# EAGLE board binary_clock_panelized (EAGLE 7.7.0), part 1 of 2
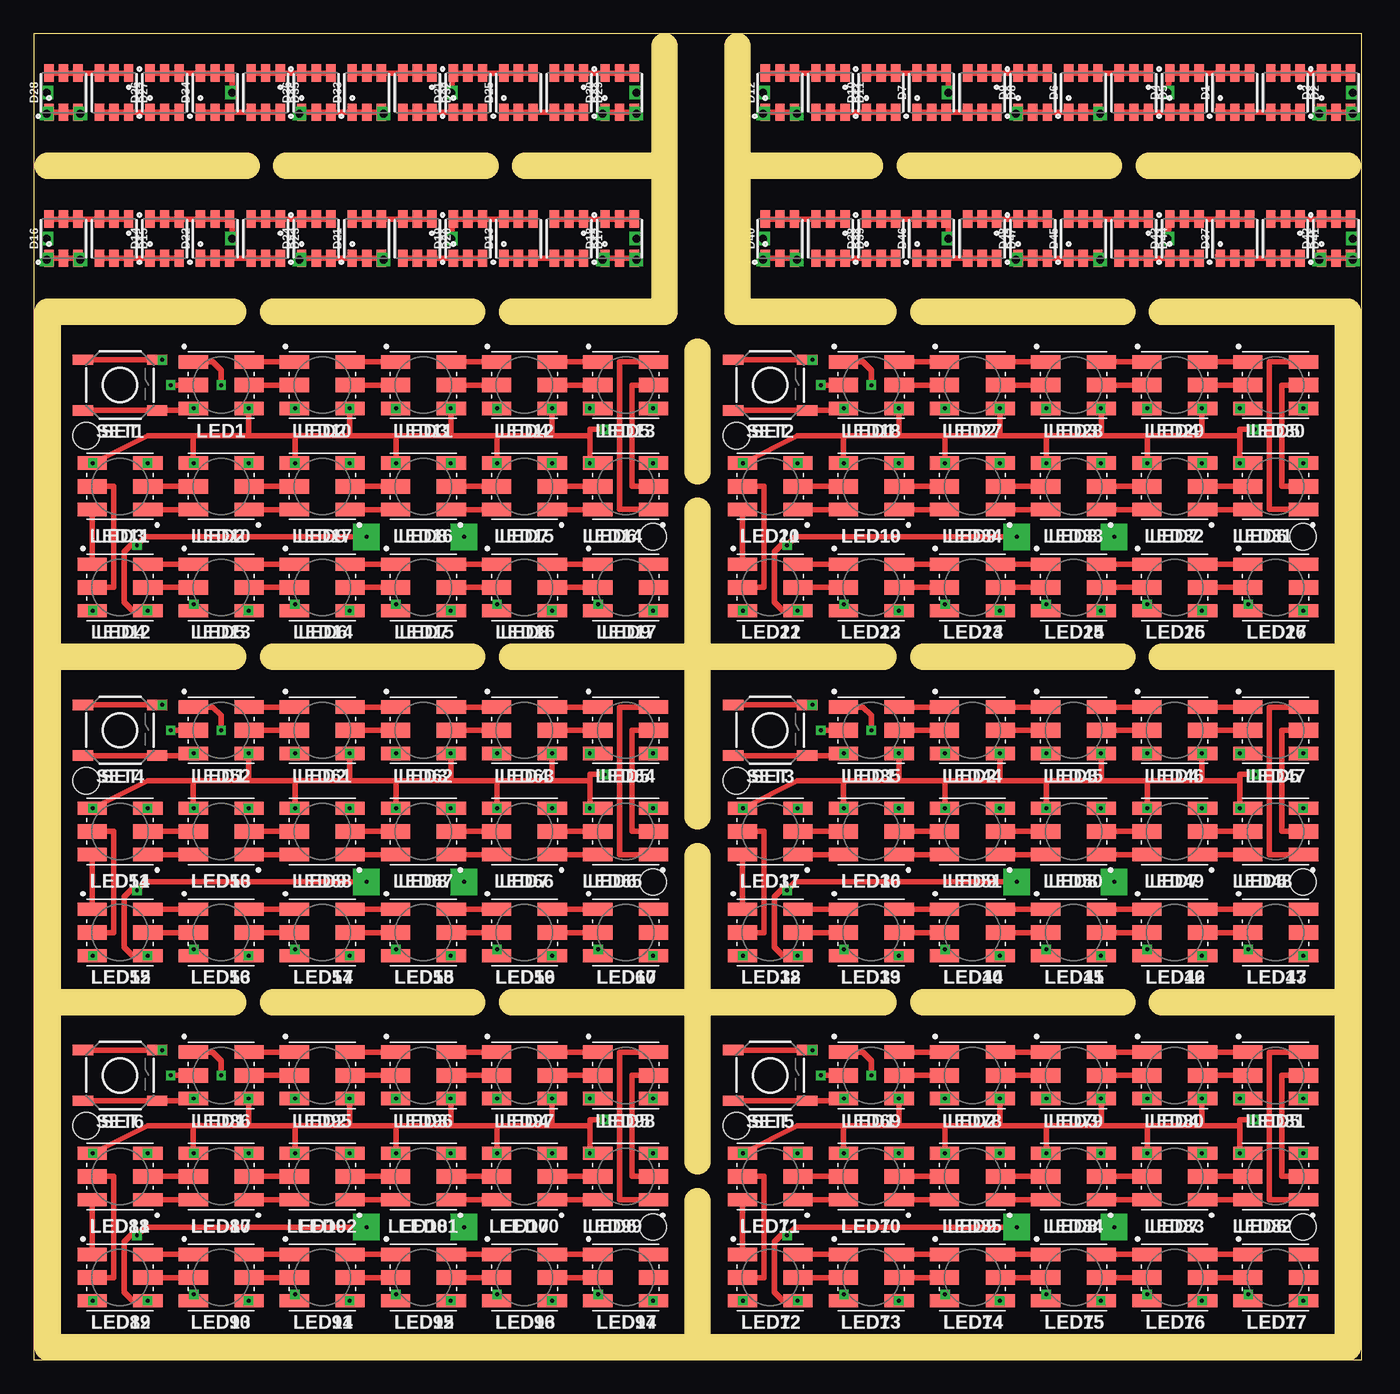
[diagram p0: board, top side]
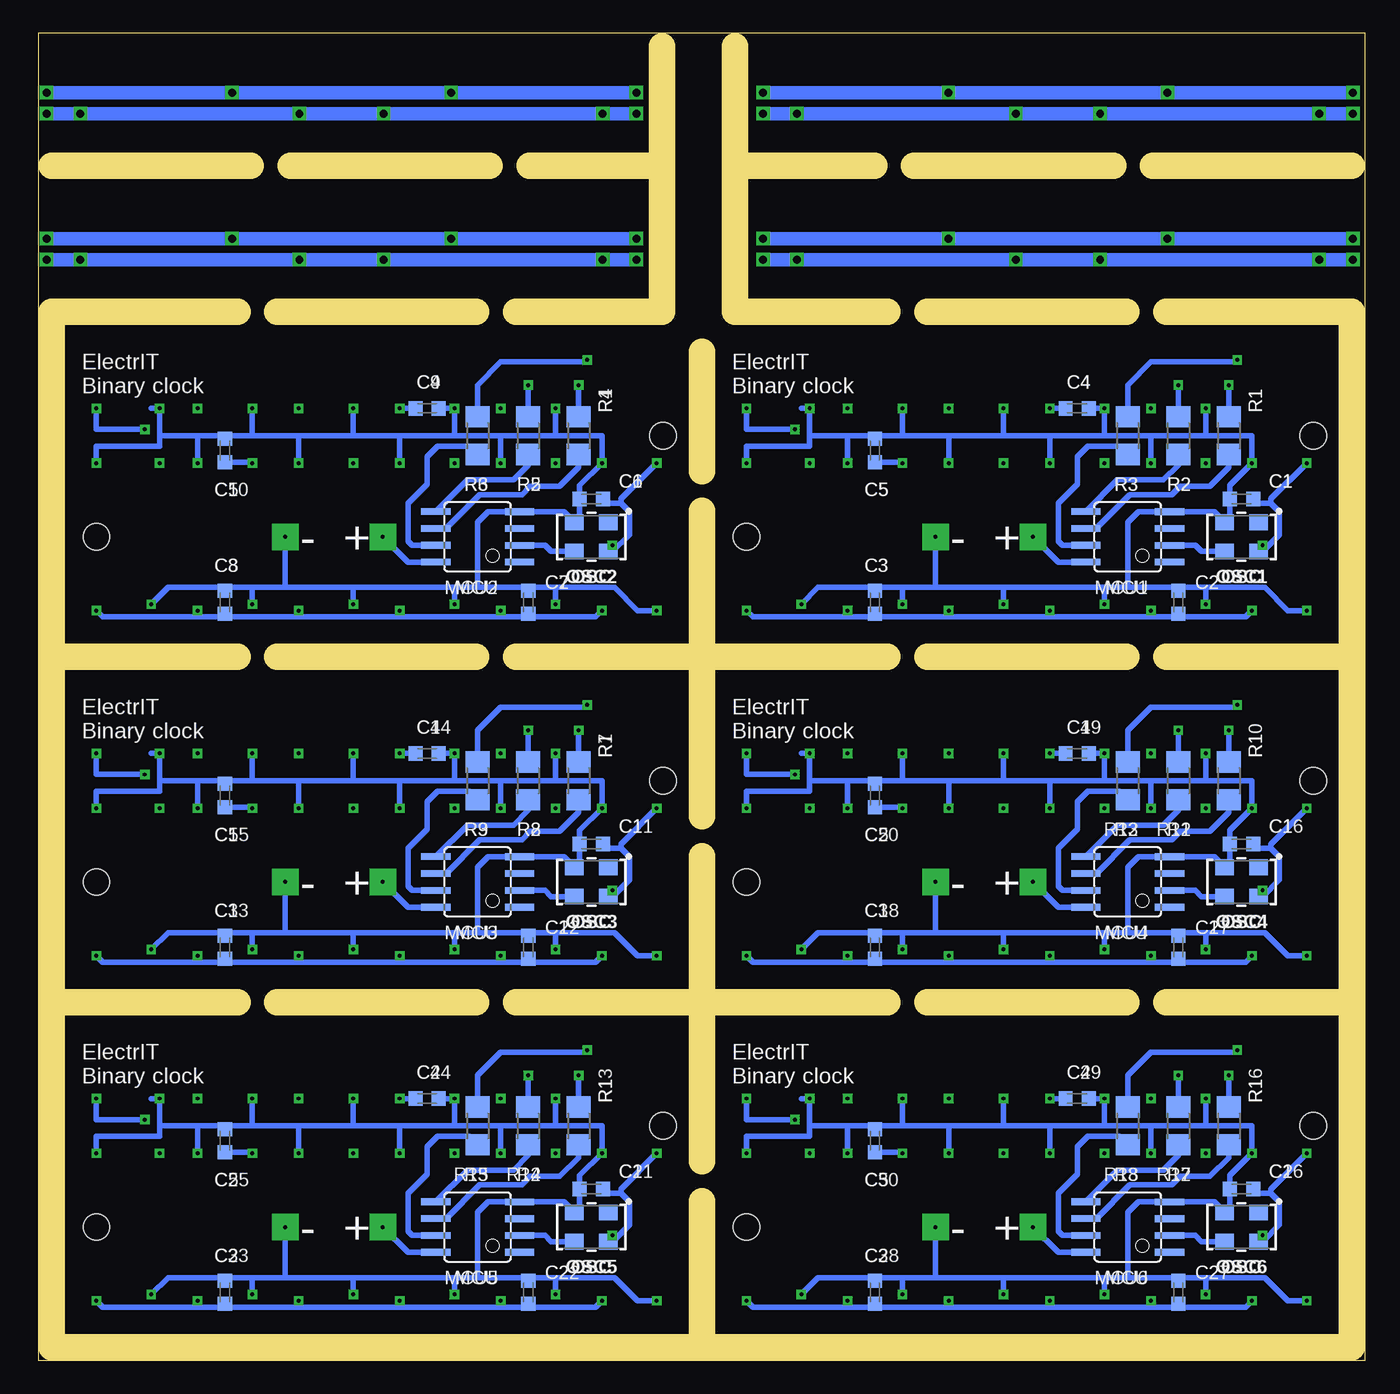
[diagram p1: board, bottom side, seen from below]

Size 100 x 100 mm. Coordinates in mm from the lower left corner, seen from the top.
Outline: 0,0 0,100 100,100 100,0 0,0
Copper layers (1*16): Top 0.035mm / dielectric 1.5mm / Bottom 0.035mm
Design rules "default": minimum track width 10mil, minimum drill 24mil, track to track 8mil, track to pad 8mil, pad to pad 8mil, via to via 8mil, smd to smd 8mil, copper to edge 40mil, drill to drill 8mil, minimum pad ring 10mil, minimum via ring 8mil, stop-mask expansion 4mil, vias tented up to drill 0mil, thermal gap 10mil
Holes 2 mm at 46.63,62.05 3.93,69.67 95.63,62.05 52.93,69.67 95.63,36.05 52.93,43.67 46.63,36.05 3.93,43.67 95.63,10.05 52.93,17.67 46.63,10.05 3.93,17.67
Milling: 44 lines

## Footprints (pad centres in the part's own frame; a part is rotated, then mirrored left to right if it is on the bottom)
C0603K = smd 1.05 x 1.08: 1 -0.875,0; 2 0.875,0
PLCC-6-LED = smd 1.3 x 0.7: AB 1.475,1.1; AG 1.475,-1.1; AR 1.475,0; CB -1.475,1.1; CG -1.475,-1.1; CR -1.475,0
APA102-5050 = smd 1 x 2.2: P1 -1.75,-2.1; P3 1.75,-2.1; P4 1.75,2.1; P6 -1.75,2.1 | smd 1.1 x 2.2: P2 0,-2.1; P5 0,2.1
SOIC8 = smd 0.5 x 2.2: 1 -1.905,-3.154; 2 -0.645,-3.154; 3 0.625,-3.154; 4 1.895,-3.154; 5 1.905,3.154; 6 0.635,3.154; 7 -0.635,3.154; 8 -1.905,3.154
OSCILLATOR-SMD-5X3.2 = smd 1.397 x 1.194: 1 -1.27,-1.1; 2 1.27,-1.1; 3 1.27,1.1; 4 -1.27,1.1
R1206 = smd 1.6 x 1.803: 1 -1.422,0; 2 1.422,0
TACTILE_SWITCH_SMD_5.2MM = smd 1.524 x 0.762: 1 -2.794,1.905; 2 2.794,1.905; 3 -2.794,-1.905; 4 2.794,-1.905

## Placement (x,y rotation side)
C1  [C0603K]  9.33,64.91 180 bottom
C2  [C0603K]  14.09,57.13 90 bottom
C3  [C0603K]  36.95,57.13 90 bottom
C4  [C0603K]  21.71,71.73 0 bottom
C5  [C0603K]  36.95,68.56 90 bottom
C6  [C0603K]  58.33,64.91 180 bottom
C7  [C0603K]  63.09,57.13 90 bottom
C8  [C0603K]  85.95,57.13 90 bottom
C9  [C0603K]  70.71,71.73 0 bottom
C10  [C0603K]  85.95,68.56 90 bottom
C11  [C0603K]  58.33,38.91 180 bottom
C12  [C0603K]  63.09,31.13 90 bottom
C13  [C0603K]  85.95,31.13 90 bottom
C14  [C0603K]  70.71,45.73 0 bottom
C15  [C0603K]  85.95,42.56 90 bottom
C16  [C0603K]  9.33,38.91 180 bottom
C17  [C0603K]  14.09,31.13 90 bottom
C18  [C0603K]  36.95,31.13 90 bottom
C19  [C0603K]  21.71,45.73 0 bottom
C20  [C0603K]  36.95,42.56 90 bottom
C21  [C0603K]  58.33,12.91 180 bottom
C22  [C0603K]  63.09,5.13 90 bottom
C23  [C0603K]  85.95,5.13 90 bottom
C24  [C0603K]  70.71,19.73 0 bottom
C25  [C0603K]  85.95,16.56 90 bottom
C26  [C0603K]  9.33,12.91 180 bottom
C27  [C0603K]  14.09,5.13 90 bottom
C28  [C0603K]  36.95,5.13 90 bottom
C29  [C0603K]  21.71,19.73 0 bottom
C30  [C0603K]  36.95,16.56 90 bottom
D1  RGB  [PLCC-6-LED]  90.49,95.52 90 top
D2  RGB  [PLCC-6-LED]  94.3,95.52 270 top
D3  RGB  [PLCC-6-LED]  98.11,95.52 90 top
D4  RGB  [PLCC-6-LED]  86.68,95.52 90 top
D5  RGB  [PLCC-6-LED]  82.87,95.52 270 top
D6  RGB  [PLCC-6-LED]  79.06,95.52 90 top
D7  RGB  [PLCC-6-LED]  67.63,95.52 90 top
D8  RGB  [PLCC-6-LED]  71.44,95.52 270 top
D9  RGB  [PLCC-6-LED]  75.25,95.52 90 top
D10  RGB  [PLCC-6-LED]  63.82,95.52 90 top
D11  RGB  [PLCC-6-LED]  60.01,95.52 270 top
D12  RGB  [PLCC-6-LED]  56.2,95.52 90 top
D13  RGB  [PLCC-6-LED]  36.49,84.52 90 top
D14  RGB  [PLCC-6-LED]  9.82,84.52 90 top
D15  RGB  [PLCC-6-LED]  6.01,84.52 270 top
D16  RGB  [PLCC-6-LED]  2.2,84.52 90 top
D17  RGB  [PLCC-6-LED]  40.3,84.52 270 top
D18  RGB  [PLCC-6-LED]  44.11,84.52 90 top
D19  RGB  [PLCC-6-LED]  32.68,84.52 90 top
D20  RGB  [PLCC-6-LED]  28.87,84.52 270 top
D21  RGB  [PLCC-6-LED]  25.06,84.52 90 top
D22  RGB  [PLCC-6-LED]  13.63,84.52 90 top
D23  RGB  [PLCC-6-LED]  17.44,84.52 270 top
D24  RGB  [PLCC-6-LED]  21.25,84.52 90 top
D25  RGB  [PLCC-6-LED]  36.49,95.52 90 top
D26  RGB  [PLCC-6-LED]  9.82,95.52 90 top
D27  RGB  [PLCC-6-LED]  6.01,95.52 270 top
D28  RGB  [PLCC-6-LED]  2.2,95.52 90 top
D29  RGB  [PLCC-6-LED]  40.3,95.52 270 top
D30  RGB  [PLCC-6-LED]  44.11,95.52 90 top
D31  RGB  [PLCC-6-LED]  32.68,95.52 90 top
D32  RGB  [PLCC-6-LED]  28.87,95.52 270 top
D33  RGB  [PLCC-6-LED]  25.06,95.52 90 top
D34  RGB  [PLCC-6-LED]  13.63,95.52 90 top
D35  RGB  [PLCC-6-LED]  17.44,95.52 270 top
D36  RGB  [PLCC-6-LED]  21.25,95.52 90 top
D37  RGB  [PLCC-6-LED]  90.49,84.52 90 top
D38  RGB  [PLCC-6-LED]  63.82,84.52 90 top
D39  RGB  [PLCC-6-LED]  60.01,84.52 270 top
D40  RGB  [PLCC-6-LED]  56.2,84.52 90 top
D41  RGB  [PLCC-6-LED]  94.3,84.52 270 top
D42  RGB  [PLCC-6-LED]  98.11,84.52 90 top
D43  RGB  [PLCC-6-LED]  86.68,84.52 90 top
D44  RGB  [PLCC-6-LED]  82.87,84.52 270 top
D45  RGB  [PLCC-6-LED]  79.06,84.52 90 top
D46  RGB  [PLCC-6-LED]  67.63,84.52 90 top
D47  RGB  [PLCC-6-LED]  71.44,84.52 270 top
D48  RGB  [PLCC-6-LED]  75.25,84.52 90 top
LED1  APA102-5050  [APA102-5050]  14.09,73.48 270 top
LED2  APA102-5050  [APA102-5050]  14.09,65.86 90 top
LED3  APA102-5050  [APA102-5050]  6.47,65.86 90 top
LED4  APA102-5050  [APA102-5050]  6.47,58.24 270 top
LED5  APA102-5050  [APA102-5050]  14.09,58.24 270 top
LED6  APA102-5050  [APA102-5050]  21.71,58.24 270 top
LED7  APA102-5050  [APA102-5050]  29.33,58.24 270 top
LED8  APA102-5050  [APA102-5050]  36.95,58.24 270 top
LED9  APA102-5050  [APA102-5050]  44.57,58.24 270 top
LED10  APA102-5050  [APA102-5050]  21.71,73.48 270 top
LED11  APA102-5050  [APA102-5050]  29.33,73.48 270 top
LED12  APA102-5050  [APA102-5050]  36.95,73.48 270 top
LED13  APA102-5050  [APA102-5050]  44.57,73.48 270 top
LED14  APA102-5050  [APA102-5050]  44.57,65.86 90 top
LED15  APA102-5050  [APA102-5050]  36.95,65.86 90 top
LED16  APA102-5050  [APA102-5050]  29.33,65.86 90 top
LED17  APA102-5050  [APA102-5050]  21.71,65.86 90 top
LED18  APA102-5050  [APA102-5050]  63.09,73.48 270 top
LED19  APA102-5050  [APA102-5050]  63.09,65.86 90 top
LED20  APA102-5050  [APA102-5050]  55.47,65.86 90 top
LED21  APA102-5050  [APA102-5050]  55.47,58.24 270 top
LED22  APA102-5050  [APA102-5050]  63.09,58.24 270 top
LED23  APA102-5050  [APA102-5050]  70.71,58.24 270 top
LED24  APA102-5050  [APA102-5050]  78.33,58.24 270 top
LED25  APA102-5050  [APA102-5050]  85.95,58.24 270 top
LED26  APA102-5050  [APA102-5050]  93.57,58.24 270 top
LED27  APA102-5050  [APA102-5050]  70.71,73.48 270 top
LED28  APA102-5050  [APA102-5050]  78.33,73.48 270 top
LED29  APA102-5050  [APA102-5050]  85.95,73.48 270 top
LED30  APA102-5050  [APA102-5050]  93.57,73.48 270 top
LED31  APA102-5050  [APA102-5050]  93.57,65.86 90 top
LED32  APA102-5050  [APA102-5050]  85.95,65.86 90 top
LED33  APA102-5050  [APA102-5050]  78.33,65.86 90 top
LED34  APA102-5050  [APA102-5050]  70.71,65.86 90 top
LED35  APA102-5050  [APA102-5050]  63.09,47.48 270 top
LED36  APA102-5050  [APA102-5050]  63.09,39.86 90 top
LED37  APA102-5050  [APA102-5050]  55.47,39.86 90 top
LED38  APA102-5050  [APA102-5050]  55.47,32.24 270 top
LED39  APA102-5050  [APA102-5050]  63.09,32.24 270 top
LED40  APA102-5050  [APA102-5050]  70.71,32.24 270 top
LED41  APA102-5050  [APA102-5050]  78.33,32.24 270 top
LED42  APA102-5050  [APA102-5050]  85.95,32.24 270 top
LED43  APA102-5050  [APA102-5050]  93.57,32.24 270 top
LED44  APA102-5050  [APA102-5050]  70.71,47.48 270 top
LED45  APA102-5050  [APA102-5050]  78.33,47.48 270 top
LED46  APA102-5050  [APA102-5050]  85.95,47.48 270 top
LED47  APA102-5050  [APA102-5050]  93.57,47.48 270 top
LED48  APA102-5050  [APA102-5050]  93.57,39.86 90 top
LED49  APA102-5050  [APA102-5050]  85.95,39.86 90 top
LED50  APA102-5050  [APA102-5050]  78.33,39.86 90 top
LED51  APA102-5050  [APA102-5050]  70.71,39.86 90 top
LED52  APA102-5050  [APA102-5050]  14.09,47.48 270 top
LED53  APA102-5050  [APA102-5050]  14.09,39.86 90 top
LED54  APA102-5050  [APA102-5050]  6.47,39.86 90 top
LED55  APA102-5050  [APA102-5050]  6.47,32.24 270 top
LED56  APA102-5050  [APA102-5050]  14.09,32.24 270 top
LED57  APA102-5050  [APA102-5050]  21.71,32.24 270 top
LED58  APA102-5050  [APA102-5050]  29.33,32.24 270 top
LED59  APA102-5050  [APA102-5050]  36.95,32.24 270 top
LED60  APA102-5050  [APA102-5050]  44.57,32.24 270 top
LED61  APA102-5050  [APA102-5050]  21.71,47.48 270 top
LED62  APA102-5050  [APA102-5050]  29.33,47.48 270 top
LED63  APA102-5050  [APA102-5050]  36.95,47.48 270 top
LED64  APA102-5050  [APA102-5050]  44.57,47.48 270 top
LED65  APA102-5050  [APA102-5050]  44.57,39.86 90 top
LED66  APA102-5050  [APA102-5050]  36.95,39.86 90 top
LED67  APA102-5050  [APA102-5050]  29.33,39.86 90 top
LED68  APA102-5050  [APA102-5050]  21.71,39.86 90 top
LED69  APA102-5050  [APA102-5050]  63.09,21.48 270 top
LED70  APA102-5050  [APA102-5050]  63.09,13.86 90 top
LED71  APA102-5050  [APA102-5050]  55.47,13.86 90 top
LED72  APA102-5050  [APA102-5050]  55.47,6.24 270 top
LED73  APA102-5050  [APA102-5050]  63.09,6.24 270 top
LED74  APA102-5050  [APA102-5050]  70.71,6.24 270 top
LED75  APA102-5050  [APA102-5050]  78.33,6.24 270 top
LED76  APA102-5050  [APA102-5050]  85.95,6.24 270 top
LED77  APA102-5050  [APA102-5050]  93.57,6.24 270 top
LED78  APA102-5050  [APA102-5050]  70.71,21.48 270 top
LED79  APA102-5050  [APA102-5050]  78.33,21.48 270 top
LED80  APA102-5050  [APA102-5050]  85.95,21.48 270 top
LED81  APA102-5050  [APA102-5050]  93.57,21.48 270 top
LED82  APA102-5050  [APA102-5050]  93.57,13.86 90 top
LED83  APA102-5050  [APA102-5050]  85.95,13.86 90 top
LED84  APA102-5050  [APA102-5050]  78.33,13.86 90 top
LED85  APA102-5050  [APA102-5050]  70.71,13.86 90 top
LED86  APA102-5050  [APA102-5050]  14.09,21.48 270 top
LED87  APA102-5050  [APA102-5050]  14.09,13.86 90 top
LED88  APA102-5050  [APA102-5050]  6.47,13.86 90 top
LED89  APA102-5050  [APA102-5050]  6.47,6.24 270 top
LED90  APA102-5050  [APA102-5050]  14.09,6.24 270 top
LED91  APA102-5050  [APA102-5050]  21.71,6.24 270 top
LED92  APA102-5050  [APA102-5050]  29.33,6.24 270 top
LED93  APA102-5050  [APA102-5050]  36.95,6.24 270 top
LED94  APA102-5050  [APA102-5050]  44.57,6.24 270 top
LED95  APA102-5050  [APA102-5050]  21.71,21.48 270 top
LED96  APA102-5050  [APA102-5050]  29.33,21.48 270 top
LED97  APA102-5050  [APA102-5050]  36.95,21.48 270 top
LED98  APA102-5050  [APA102-5050]  44.57,21.48 270 top
LED99  APA102-5050  [APA102-5050]  44.57,13.86 90 top
LED100  APA102-5050  [APA102-5050]  36.95,13.86 90 top
LED101  APA102-5050  [APA102-5050]  29.33,13.86 90 top
LED102  APA102-5050  [APA102-5050]  21.71,13.86 90 top
MCU1  TINY25-20SU  [SOIC8]  17.9,62.05 90 bottom
MCU2  TINY25-20SU  [SOIC8]  66.9,62.05 90 bottom
MCU3  TINY25-20SU  [SOIC8]  66.9,36.05 90 bottom
MCU4  TINY25-20SU  [SOIC8]  17.9,36.05 90 bottom
MCU5  TINY25-20SU  [SOIC8]  66.9,10.05 90 bottom
MCU6  TINY25-20SU  [SOIC8]  17.9,10.05 90 bottom
OSC1  OSCILLATORSMD-5X3  [OSCILLATOR-SMD-5X3.2]  9.33,62.05 180 bottom
OSC2  OSCILLATORSMD-5X3  [OSCILLATOR-SMD-5X3.2]  58.33,62.05 180 bottom
OSC3  OSCILLATORSMD-5X3  [OSCILLATOR-SMD-5X3.2]  58.33,36.05 180 bottom
OSC4  OSCILLATORSMD-5X3  [OSCILLATOR-SMD-5X3.2]  9.33,36.05 180 bottom
OSC5  OSCILLATORSMD-5X3  [OSCILLATOR-SMD-5X3.2]  58.33,10.05 180 bottom
OSC6  OSCILLATORSMD-5X3  [OSCILLATOR-SMD-5X3.2]  9.33,10.05 180 bottom
R1  [R1206]  10.28,69.67 90 bottom
R2  [R1206]  14.09,69.67 90 bottom
R3  [R1206]  17.9,69.67 90 bottom
R4  [R1206]  59.28,69.67 90 bottom
R5  [R1206]  63.09,69.67 90 bottom
R6  [R1206]  66.9,69.67 90 bottom
R7  [R1206]  59.28,43.67 90 bottom
R8  [R1206]  63.09,43.67 90 bottom
R9  [R1206]  66.9,43.67 90 bottom
R10  [R1206]  10.28,43.67 90 bottom
R11  [R1206]  14.09,43.67 90 bottom
R12  [R1206]  17.9,43.67 90 bottom
R13  [R1206]  59.28,17.67 90 bottom
R14  [R1206]  63.09,17.67 90 bottom
R15  [R1206]  66.9,17.67 90 bottom
R16  [R1206]  10.28,17.67 90 bottom
R17  [R1206]  14.09,17.67 90 bottom
R18  [R1206]  17.9,17.67 90 bottom
SET1  SET  [TACTILE_SWITCH_SMD_5.2MM]  6.47,73.48 0 top
SET2  SET  [TACTILE_SWITCH_SMD_5.2MM]  55.47,73.48 0 top
SET3  SET  [TACTILE_SWITCH_SMD_5.2MM]  55.47,47.48 0 top
SET4  SET  [TACTILE_SWITCH_SMD_5.2MM]  6.47,47.48 0 top
SET5  SET  [TACTILE_SWITCH_SMD_5.2MM]  55.47,21.48 0 top
SET6  SET  [TACTILE_SWITCH_SMD_5.2MM]  6.47,21.48 0 top

## Library data of the parts
C1-C30 R1-R18 = rcl
D1-D48 = SparkFun-LED; PROD_ID: DIO-12113
LED1-LED102 = SparkFun-LED; PROD_ID: DIO-13739
MCU1-MCU6 = avr-4
OSC1-OSC6 = SparkFun-Clocks
SET1-SET6 = SparkFun-Switches; PROD_ID: SWCH-08247; SF_SKU: COM-08720

## Nets
+5V1: C1.1 C2.1 C3.1 C4.1 C5.1 LED1.P4 LED2.P4 LED3.P4 LED4.P4 LED5.P4 LED6.P4 LED7.P4 LED8.P4 LED10.P4 LED11.P4 LED12.P4 LED13.P4 LED14.P4 LED15.P4 LED16.P4 LED17.P4 MCU1.8 OSC1.4
+5V2: C6.1 C7.1 C8.1 C9.1 C10.1 LED18.P4 LED19.P4 LED20.P4 LED21.P4 LED22.P4 LED23.P4 LED24.P4 LED25.P4 LED27.P4 LED28.P4 LED29.P4 LED30.P4 LED31.P4 LED32.P4 LED33.P4 LED34.P4 MCU2.8 OSC2.4
+5V3: C11.1 C12.1 C13.1 C14.1 C15.1 LED35.P4 LED36.P4 LED37.P4 LED38.P4 LED39.P4 LED40.P4 LED41.P4 LED42.P4 LED44.P4 LED45.P4 LED46.P4 LED47.P4 LED48.P4 LED49.P4 LED50.P4 LED51.P4 MCU3.8 OSC3.4
+5V4: C16.1 C17.1 C18.1 C19.1 C20.1 LED52.P4 LED53.P4 LED54.P4 LED55.P4 LED56.P4 LED57.P4 LED58.P4 LED59.P4 LED61.P4 LED62.P4 LED63.P4 LED64.P4 LED65.P4 LED66.P4 LED67.P4 LED68.P4 MCU4.8 OSC4.4
+5V5: C21.1 C22.1 C23.1 C24.1 C25.1 LED69.P4 LED70.P4 LED71.P4 LED72.P4 LED73.P4 LED74.P4 LED75.P4 LED76.P4 LED78.P4 LED79.P4 LED80.P4 LED81.P4 LED82.P4 LED83.P4 LED84.P4 LED85.P4 MCU5.8 OSC5.4
+5V6: C26.1 C27.1 C28.1 C29.1 C30.1 LED86.P4 LED87.P4 LED88.P4 LED89.P4 LED90.P4 LED91.P4 LED92.P4 LED93.P4 LED95.P4 LED96.P4 LED97.P4 LED98.P4 LED99.P4 LED100.P4 LED101.P4 LED102.P4 MCU6.8 OSC6.4
GND1: C1.2 C2.2 C3.2 C4.2 C5.2 LED1.P3 LED2.P3 LED3.P3 LED4.P3 LED5.P3 LED6.P3 LED7.P3 LED8.P3 LED9.P3 LED10.P3 LED11.P3 LED12.P3 LED13.P3 LED14.P3 LED15.P3 LED16.P3 LED17.P3 MCU1.4 OSC1.2 SET1.3 SET1.4
GND2: C6.2 C7.2 C8.2 C9.2 C10.2 LED18.P3 LED19.P3 LED20.P3 LED21.P3 LED22.P3 LED23.P3 LED24.P3 LED25.P3 LED26.P3 LED27.P3 LED28.P3 LED29.P3 LED30.P3 LED31.P3 LED32.P3 LED33.P3 LED34.P3 MCU2.4 OSC2.2 SET2.3 SET2.4
GND3: C11.2 C12.2 C13.2 C14.2 C15.2 LED35.P3 LED36.P3 LED37.P3 LED38.P3 LED39.P3 LED40.P3 LED41.P3 LED42.P3 LED43.P3 LED44.P3 LED45.P3 LED46.P3 LED47.P3 LED48.P3 LED49.P3 LED50.P3 LED51.P3 MCU3.4 OSC3.2 SET3.3 SET3.4
GND4: C16.2 C17.2 C18.2 C19.2 C20.2 LED52.P3 LED53.P3 LED54.P3 LED55.P3 LED56.P3 LED57.P3 LED58.P3 LED59.P3 LED60.P3 LED61.P3 LED62.P3 LED63.P3 LED64.P3 LED65.P3 LED66.P3 LED67.P3 LED68.P3 MCU4.4 OSC4.2 SET4.3 SET4.4
GND5: C21.2 C22.2 C23.2 C24.2 C25.2 LED69.P3 LED70.P3 LED71.P3 LED72.P3 LED73.P3 LED74.P3 LED75.P3 LED76.P3 LED77.P3 LED78.P3 LED79.P3 LED80.P3 LED81.P3 LED82.P3 LED83.P3 LED84.P3 LED85.P3 MCU5.4 OSC5.2 SET5.3 SET5.4
GND6: C26.2 C27.2 C28.2 C29.2 C30.2 LED86.P3 LED87.P3 LED88.P3 LED89.P3 LED90.P3 LED91.P3 LED92.P3 LED93.P3 LED94.P3 LED95.P3 LED96.P3 LED97.P3 LED98.P3 LED99.P3 LED100.P3 LED101.P3 LED102.P3 MCU6.4 OSC6.2 SET6.3 SET6.4
GND7: D3.CB D3.CG D3.CR D6.CB D6.CG D6.CR D9.CB D9.CG D9.CR D12.CB D12.CG D12.CR
GND8: D16.CB D16.CG D16.CR D18.CB D18.CG D18.CR D21.CB D21.CG D21.CR D24.CB D24.CG D24.CR
GND9: D28.CB D28.CG D28.CR D30.CB D30.CG D30.CR D33.CB D33.CG D33.CR D36.CB D36.CG D36.CR
GND10: D40.CB D40.CG D40.CR D42.CB D42.CG D42.CR D45.CB D45.CG D45.CR D48.CB D48.CG D48.CR
LED_CK1: MCU1.6 R1.1
LED_CK2: MCU2.6 R4.1
LED_CK3: MCU3.6 R7.1
LED_CK4: MCU4.6 R10.1
LED_CK5: MCU5.6 R13.1
LED_CK6: MCU6.6 R16.1
LED_D1: MCU1.5 R2.1
LED_D2: MCU2.5 R5.1
LED_D3: MCU3.5 R8.1
LED_D4: MCU4.5 R11.1
LED_D5: MCU5.5 R14.1
LED_D6: MCU6.5 R17.1
N$1: LED1.P5 LED10.P2
N$2: LED1.P6 LED10.P1
N$3: LED10.P5 LED11.P2
N$4: LED10.P6 LED11.P1
N$5: LED11.P5 LED12.P2
N$6: LED11.P6 LED12.P1
N$7: LED12.P5 LED13.P2
N$8: LED12.P6 LED13.P1
N$9: LED4.P5 LED5.P2
N$10: LED4.P6 LED5.P1
N$11: LED5.P5 LED6.P2
N$12: LED5.P6 LED6.P1
N$13: LED6.P5 LED7.P2
N$14: LED6.P6 LED7.P1
N$15: LED7.P5 LED8.P2
N$16: LED7.P6 LED8.P1
N$17: LED8.P5 LED9.P2
N$18: LED8.P6 LED9.P1
N$19: LED9.P4
N$20: LED2.P5 LED3.P2
N$21: LED2.P6 LED3.P1
N$22: LED2.P1 LED17.P6
N$23: LED2.P2 LED17.P5
N$24: LED16.P6 LED17.P1
N$25: LED16.P5 LED17.P2
N$26: LED15.P6 LED16.P1
N$27: LED15.P5 LED16.P2
N$28: LED14.P6 LED15.P1
N$29: LED14.P5 LED15.P2
N$30: LED3.P6 LED4.P1
N$31: LED3.P5 LED4.P2
N$32: LED9.P6
N$33: LED9.P5
N$34: LED13.P6 LED14.P1
N$35: LED1.P1 R2.2
N$36: LED1.P2 R1.2
N$37: LED13.P5 LED14.P2
N$38: MCU1.1
N$39: MCU1.3
N$40: MCU1.2 OSC1.3
N$41: R3.2 SET1.1 SET1.2
N$42: LED18.P5 LED27.P2
N$43: LED18.P6 LED27.P1
N$44: LED27.P5 LED28.P2
N$45: LED27.P6 LED28.P1
N$46: LED28.P5 LED29.P2
N$47: LED28.P6 LED29.P1
N$48: LED29.P5 LED30.P2
N$49: LED29.P6 LED30.P1
N$50: LED21.P5 LED22.P2
N$51: LED21.P6 LED22.P1
N$52: LED22.P5 LED23.P2
N$53: LED22.P6 LED23.P1
N$54: LED23.P5 LED24.P2
N$55: LED23.P6 LED24.P1
N$56: LED24.P5 LED25.P2
N$57: LED24.P6 LED25.P1
N$58: LED25.P5 LED26.P2
N$59: LED25.P6 LED26.P1
N$60: LED26.P4
N$61: LED19.P5 LED20.P2
N$62: LED19.P6 LED20.P1
N$63: LED19.P1 LED34.P6
N$64: LED19.P2 LED34.P5
N$65: LED33.P6 LED34.P1
N$66: LED33.P5 LED34.P2
N$67: LED32.P6 LED33.P1
N$68: LED32.P5 LED33.P2
N$69: LED31.P6 LED32.P1
N$70: LED31.P5 LED32.P2
N$71: LED20.P6 LED21.P1
N$72: LED20.P5 LED21.P2
N$73: LED26.P6
N$74: LED26.P5
N$75: LED30.P6 LED31.P1
N$76: LED18.P1 R5.2
N$77: LED18.P2 R4.2
N$78: LED30.P5 LED31.P2
N$79: MCU2.1
N$80: MCU2.3
N$81: MCU2.2 OSC2.3
N$82: R6.2 SET2.1 SET2.2
N$83: LED35.P5 LED44.P2
N$84: LED35.P6 LED44.P1
N$85: LED44.P5 LED45.P2
N$86: LED44.P6 LED45.P1
N$87: LED45.P5 LED46.P2
N$88: LED45.P6 LED46.P1
N$89: LED46.P5 LED47.P2
N$90: LED46.P6 LED47.P1
N$91: LED38.P5 LED39.P2
N$92: LED38.P6 LED39.P1
N$93: LED39.P5 LED40.P2
N$94: LED39.P6 LED40.P1
N$95: LED40.P5 LED41.P2
N$96: LED40.P6 LED41.P1
N$97: LED41.P5 LED42.P2
N$98: LED41.P6 LED42.P1
N$99: LED42.P5 LED43.P2
N$100: LED42.P6 LED43.P1
N$101: LED43.P4
N$102: LED36.P5 LED37.P2
N$103: LED36.P6 LED37.P1
N$104: LED36.P1 LED51.P6
N$105: LED36.P2 LED51.P5
N$106: LED50.P6 LED51.P1
N$107: LED50.P5 LED51.P2
N$108: LED49.P6 LED50.P1
N$109: LED49.P5 LED50.P2
N$110: LED48.P6 LED49.P1
N$111: LED48.P5 LED49.P2
N$112: LED37.P6 LED38.P1
N$113: LED37.P5 LED38.P2
N$114: LED43.P6
N$115: LED43.P5
N$116: LED47.P6 LED48.P1
N$117: LED35.P1 R8.2
N$118: LED35.P2 R7.2
N$119: LED47.P5 LED48.P2
N$120: MCU3.1
N$121: MCU3.3
N$122: MCU3.2 OSC3.3
N$123: R9.2 SET3.1 SET3.2
N$124: LED52.P5 LED61.P2
N$125: LED52.P6 LED61.P1
N$126: LED61.P5 LED62.P2
N$127: LED61.P6 LED62.P1
N$128: LED62.P5 LED63.P2
N$129: LED62.P6 LED63.P1
N$130: LED63.P5 LED64.P2
N$131: LED63.P6 LED64.P1
N$132: LED55.P5 LED56.P2
N$133: LED55.P6 LED56.P1
N$134: LED56.P5 LED57.P2
N$135: LED56.P6 LED57.P1
N$136: LED57.P5 LED58.P2
N$137: LED57.P6 LED58.P1
N$138: LED58.P5 LED59.P2
N$139: LED58.P6 LED59.P1
N$140: LED59.P5 LED60.P2
N$141: LED59.P6 LED60.P1
N$142: LED60.P4
N$143: LED53.P5 LED54.P2
N$144: LED53.P6 LED54.P1
N$145: LED53.P1 LED68.P6
N$146: LED53.P2 LED68.P5
N$147: LED67.P6 LED68.P1
N$148: LED67.P5 LED68.P2
N$149: LED66.P6 LED67.P1
N$150: LED66.P5 LED67.P2
N$151: LED65.P6 LED66.P1
N$152: LED65.P5 LED66.P2
N$153: LED54.P6 LED55.P1
N$154: LED54.P5 LED55.P2
N$155: LED60.P6
N$156: LED60.P5
N$157: LED64.P6 LED65.P1
N$158: LED52.P1 R11.2
N$159: LED52.P2 R10.2
N$160: LED64.P5 LED65.P2
N$161: MCU4.1
N$162: MCU4.3
N$163: MCU4.2 OSC4.3
N$164: R12.2 SET4.1 SET4.2
N$165: LED69.P5 LED78.P2
N$166: LED69.P6 LED78.P1
N$167: LED78.P5 LED79.P2
N$168: LED78.P6 LED79.P1
N$169: LED79.P5 LED80.P2
N$170: LED79.P6 LED80.P1
N$171: LED80.P5 LED81.P2
N$172: LED80.P6 LED81.P1
N$173: LED72.P5 LED73.P2
N$174: LED72.P6 LED73.P1
N$175: LED73.P5 LED74.P2
N$176: LED73.P6 LED74.P1
N$177: LED74.P5 LED75.P2
N$178: LED74.P6 LED75.P1
N$179: LED75.P5 LED76.P2
N$180: LED75.P6 LED76.P1
N$181: LED76.P5 LED77.P2
N$182: LED76.P6 LED77.P1
N$183: LED77.P4
N$184: LED70.P5 LED71.P2
N$185: LED70.P6 LED71.P1
N$186: LED70.P1 LED85.P6
N$187: LED70.P2 LED85.P5
N$188: LED84.P6 LED85.P1
N$189: LED84.P5 LED85.P2
N$190: LED83.P6 LED84.P1
N$191: LED83.P5 LED84.P2
N$192: LED82.P6 LED83.P1
N$193: LED82.P5 LED83.P2
N$194: LED71.P6 LED72.P1
N$195: LED71.P5 LED72.P2
N$196: LED77.P6
N$197: LED77.P5
N$198: LED81.P6 LED82.P1
N$199: LED69.P1 R14.2
N$200: LED69.P2 R13.2
N$201: LED81.P5 LED82.P2
N$202: MCU5.1
N$203: MCU5.3
N$204: MCU5.2 OSC5.3
N$205: R15.2 SET5.1 SET5.2
N$206: LED86.P5 LED95.P2
N$207: LED86.P6 LED95.P1
N$208: LED95.P5 LED96.P2
N$209: LED95.P6 LED96.P1
N$210: LED96.P5 LED97.P2
N$211: LED96.P6 LED97.P1
N$212: LED97.P5 LED98.P2
N$213: LED97.P6 LED98.P1
N$214: LED89.P5 LED90.P2
N$215: LED89.P6 LED90.P1
N$216: LED90.P5 LED91.P2
N$217: LED90.P6 LED91.P1
N$218: LED91.P5 LED92.P2
N$219: LED91.P6 LED92.P1
N$220: LED92.P5 LED93.P2
N$221: LED92.P6 LED93.P1
N$222: LED93.P5 LED94.P2
N$223: LED93.P6 LED94.P1
N$224: LED94.P4
N$225: LED87.P5 LED88.P2
N$226: LED87.P6 LED88.P1
N$227: LED87.P1 LED102.P6
N$228: LED87.P2 LED102.P5
N$229: LED101.P6 LED102.P1
N$230: LED101.P5 LED102.P2
N$231: LED100.P6 LED101.P1
N$232: LED100.P5 LED101.P2
N$233: LED99.P6 LED100.P1
N$234: LED99.P5 LED100.P2
N$235: LED88.P6 LED89.P1
N$236: LED88.P5 LED89.P2
N$237: LED94.P6
N$238: LED94.P5
N$239: LED98.P6 LED99.P1
N$240: LED86.P1 R17.2
N$241: LED86.P2 R16.2
N$242: LED98.P5 LED99.P2
N$243: MCU6.1
N$244: MCU6.3
N$245: MCU6.2 OSC6.3
N$246: R18.2 SET6.1 SET6.2
N$288: D1.CB D1.CG D1.CR D2.AB D2.AG D2.AR
N$289: D2.CB D2.CG D2.CR D3.AB D3.AG D3.AR
N$290: D4.CB D4.CG D4.CR D5.AB D5.AG D5.AR
N$291: D5.CB D5.CG D5.CR D6.AB D6.AG D6.AR
N$292: D7.CB D7.CG D7.CR D8.AB D8.AG D8.AR
N$293: D8.CB D8.CG D8.CR D9.AB D9.AG D9.AR
N$294: D10.CB D10.CG D10.CR D11.AB D11.AG D11.AR
N$295: D11.CB D11.CG D11.CR D12.AB D12.AG D12.AR
N$296: D13.CB D13.CG D13.CR D17.AB D17.AG D17.AR
N$297: D17.CB D17.CG D17.CR D18.AB D18.AG D18.AR
N$298: D19.CB D19.CG D19.CR D20.AB D20.AG D20.AR
N$299: D20.CB D20.CG D20.CR D21.AB D21.AG D21.AR
N$300: D22.CB D22.CG D22.CR D23.AB D23.AG D23.AR
N$301: D23.CB D23.CG D23.CR D24.AB D24.AG D24.AR
N$302: D14.CB D14.CG D14.CR D15.AB D15.AG D15.AR
N$303: D15.CB D15.CG D15.CR D16.AB D16.AG D16.AR
N$304: D25.CB D25.CG D25.CR D29.AB D29.AG D29.AR
N$305: D29.CB D29.CG D29.CR D30.AB D30.AG D30.AR
N$306: D31.CB D31.CG D31.CR D32.AB D32.AG D32.AR
N$307: D32.CB D32.CG D32.CR D33.AB D33.AG D33.AR
N$308: D34.CB D34.CG D34.CR D35.AB D35.AG D35.AR
N$309: D35.CB D35.CG D35.CR D36.AB D36.AG D36.AR
N$310: D26.CB D26.CG D26.CR D27.AB D27.AG D27.AR
N$311: D27.CB D27.CG D27.CR D28.AB D28.AG D28.AR
N$312: D37.CB D37.CG D37.CR D41.AB D41.AG D41.AR
N$313: D41.CB D41.CG D41.CR D42.AB D42.AG D42.AR
N$314: D43.CB D43.CG D43.CR D44.AB D44.AG D44.AR
N$315: D44.CB D44.CG D44.CR D45.AB D45.AG D45.AR
N$316: D46.CB D46.CG D46.CR D47.AB D47.AG D47.AR
N$317: D47.CB D47.CG D47.CR D48.AB D48.AG D48.AR
N$318: D38.CB D38.CG D38.CR D39.AB D39.AG D39.AR
N$319: D39.CB D39.CG D39.CR D40.AB D40.AG D40.AR
SW1: MCU1.7 R3.1
SW2: MCU2.7 R6.1
SW3: MCU3.7 R9.1
SW4: MCU4.7 R12.1
SW5: MCU5.7 R15.1
SW6: MCU6.7 R18.1
VCC: D1.AB D1.AG D1.AR D4.AB D4.AG D4.AR D7.AB D7.AG D7.AR D10.AB D10.AG D10.AR
VCC1: D13.AB D13.AG D13.AR D14.AB D14.AG D14.AR D19.AB D19.AG D19.AR D22.AB D22.AG D22.AR
VCC2: D25.AB D25.AG D25.AR D26.AB D26.AG D26.AR D31.AB D31.AG D31.AR D34.AB D34.AG D34.AR
VCC3: D37.AB D37.AG D37.AR D38.AB D38.AG D38.AR D43.AB D43.AG D43.AR D46.AB D46.AG D46.AR